# Altium PCB 3LED_3Button.PcbDoc
Units mm, origin at the board's own origin, x right, y up, seen from the top; angles counter-clockwise.
Board outline 47.05 x 63.85 mm, 2 copper layers (Top Layer, Bottom Layer), stack 1.569 mm thick; 28 components, 19 nets, 109 pads, 0 vias.
Unrouted connection lines stored in the file: 19.
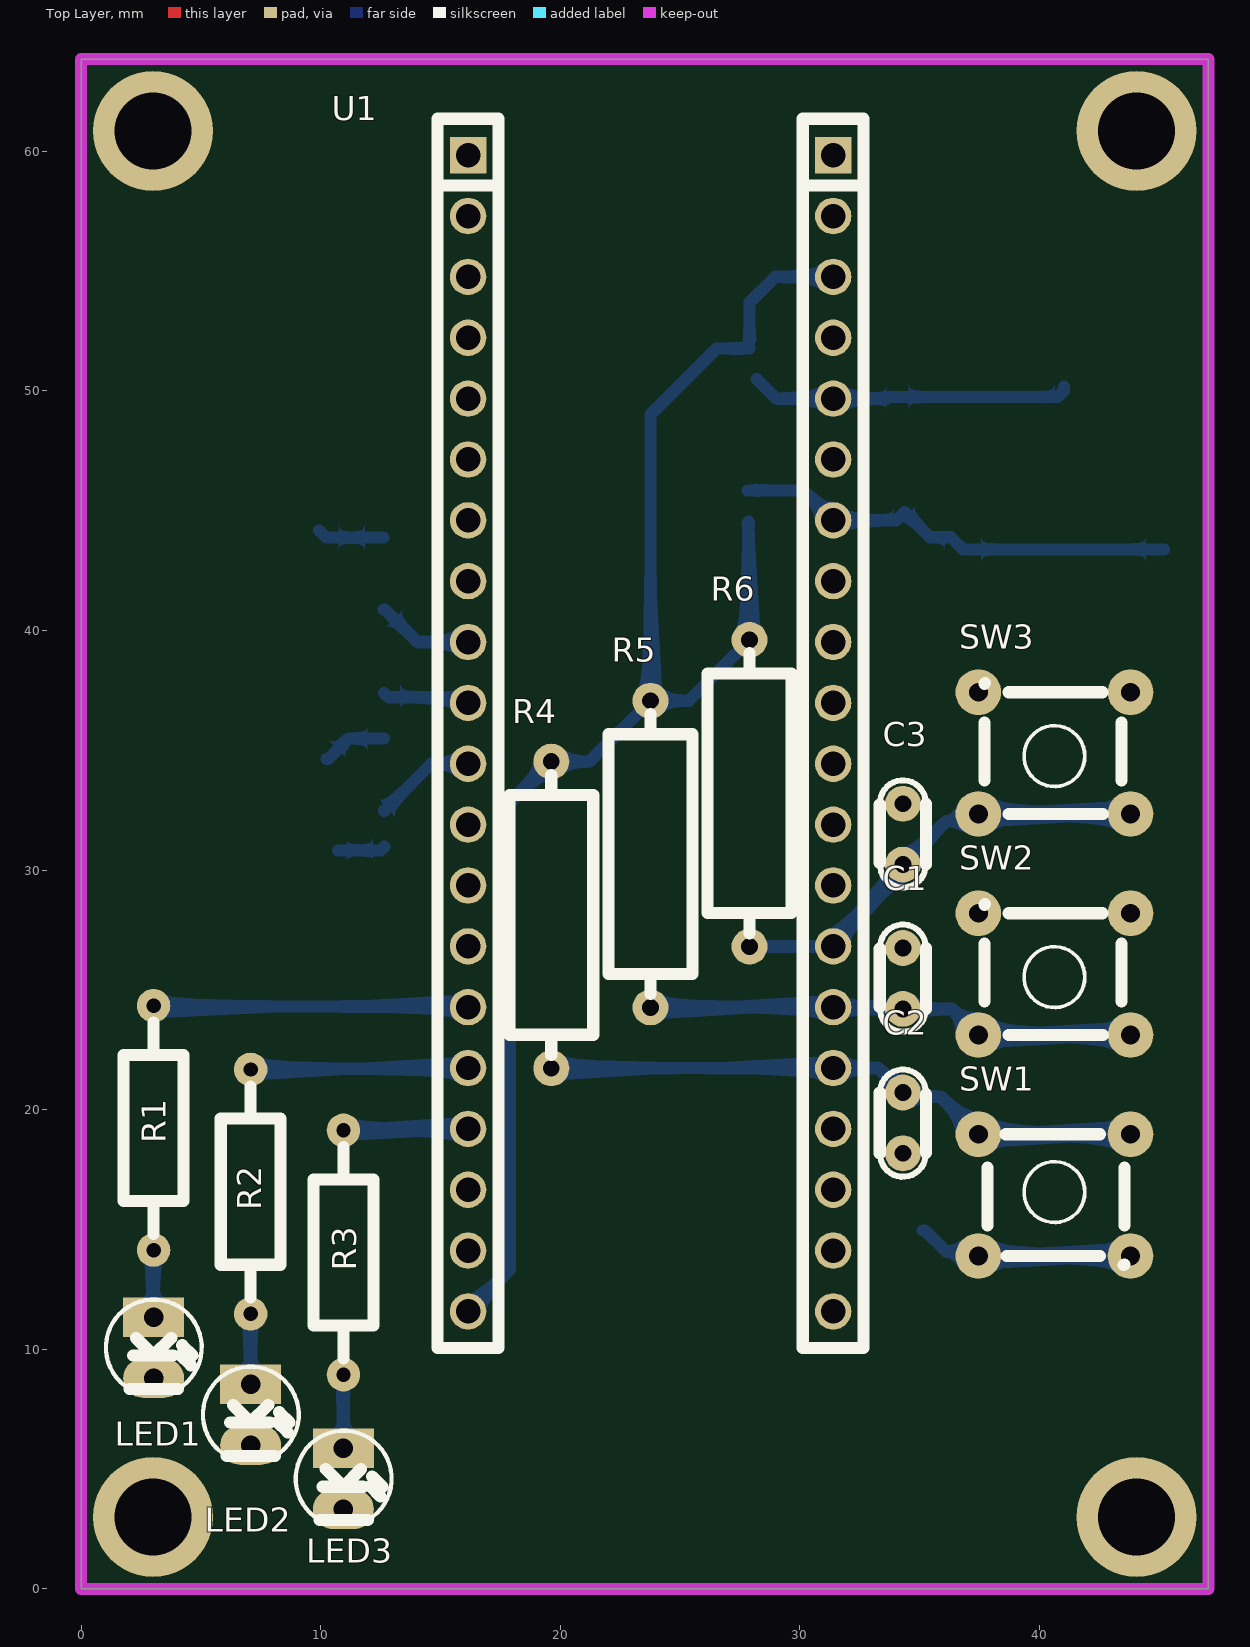
[diagram p0: Top Layer view]
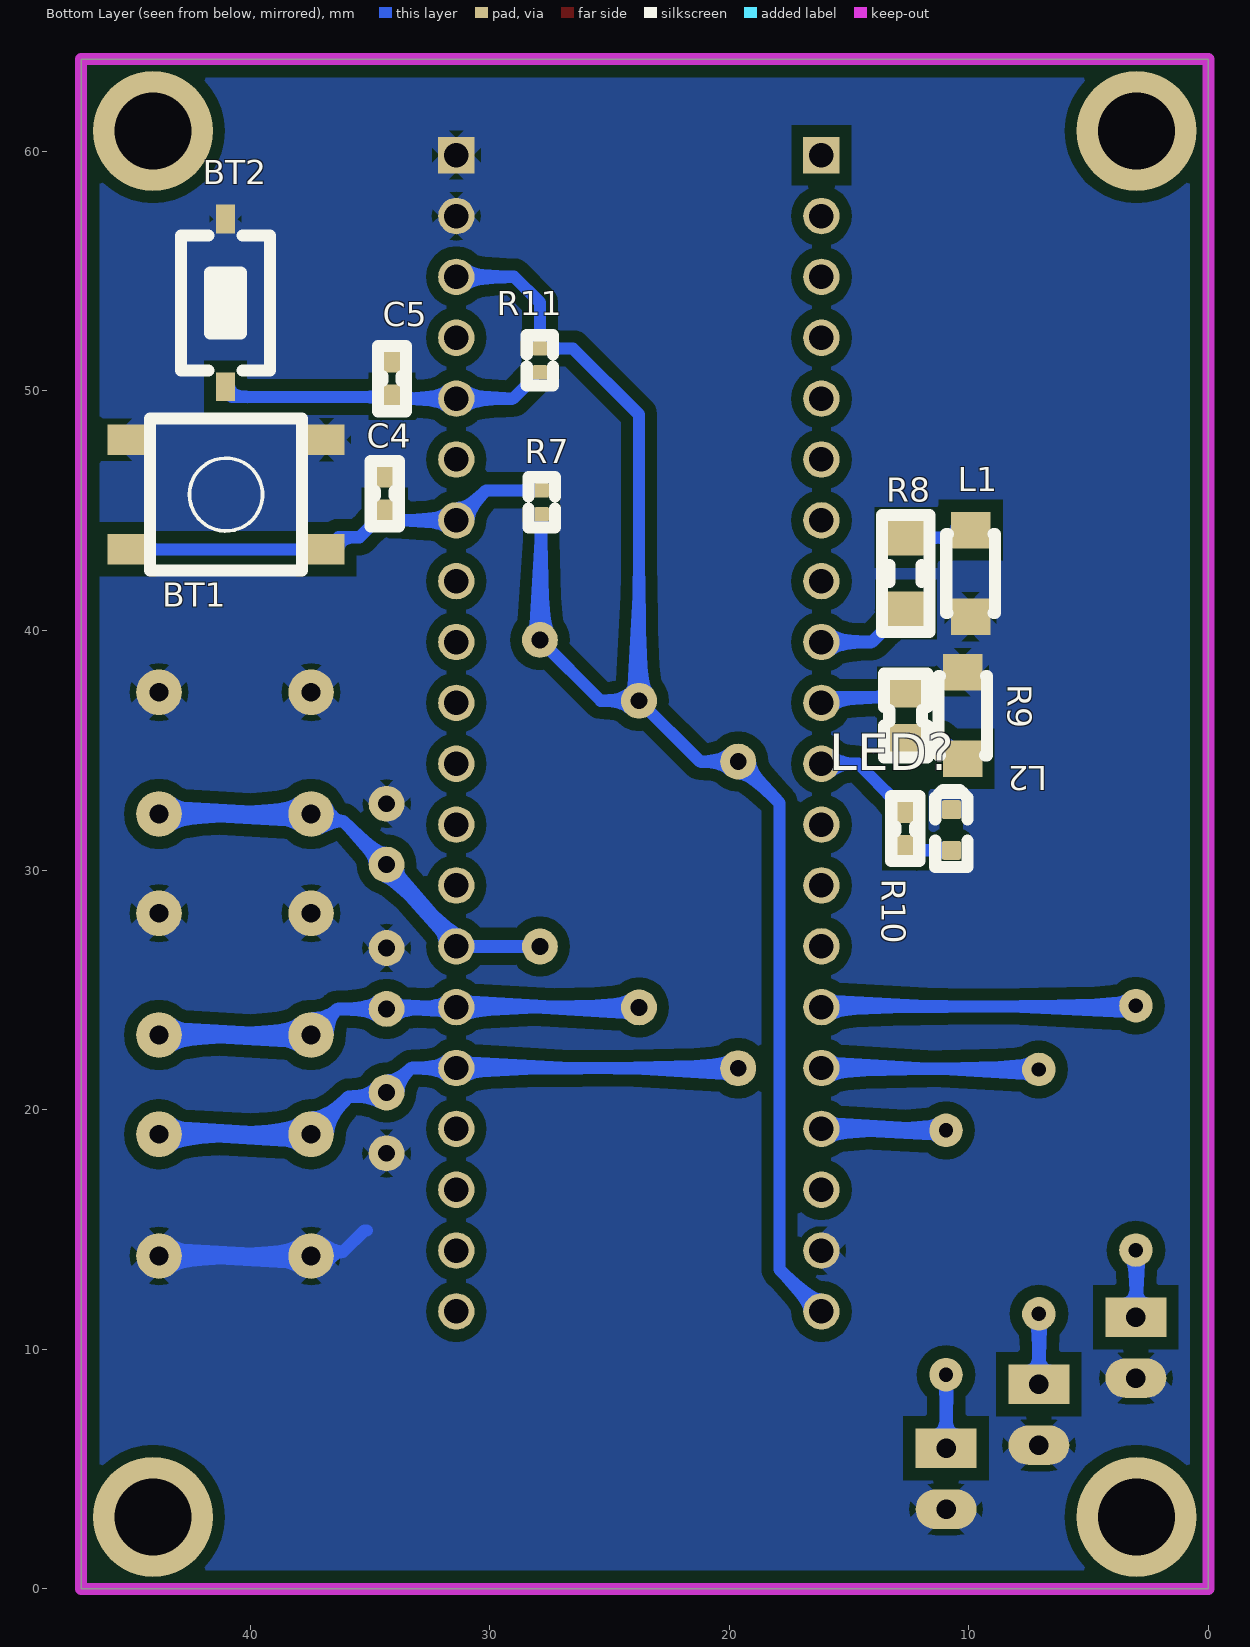
[diagram p1: Bottom Layer view, seen from below]

## Layer stack, top to bottom
Top Solder: solder mask 0.0254, SM-001, Dk 4
Top Layer: signal copper 0.035
Dielectric 1: core 1.4986, Core-043, Dk 4.3
Bottom Layer: signal copper 0.035
Bottom Solder: solder mask 0.0254, SM-001, Dk 4

## Board outline
0,0 0,63.85 47.05,63.85 47.05,0

## Design rules (kind name [scope] priority, off if disabled: settings)
Clearance [All] p1: gap=0.508 ignorepadtopadclearanceinfootprint=FALSE
PolygonConnect [All] p1: connectstyle=Relief reliefconductorwidth=1.016 reliefentries=4 polygonreliefangle="45 Angle" airgapwidth=0.254
RoutingVias [All] p1: holewidth=0.711 width=1.27 viastyle="Through Hole" minholewidth=0.711 minwidth=1.27 maxholewidth=0.711 maxwidth=1.27
SilkToSolderMaskClearance [IsPad] p1: minsilkscreentomaskgap=0.025 clearancetoexposedcopper=TRUE
SolderMaskExpansion [All] p1: expansion=0.102 istentingtop=FALSE
Width [All] p1: maxlimit=1.27 minlimit=0.254 preferedwidth=0.762
29 further rules are at their usual default settings.

## Components (designator, comment, footprint, x,y, rotation, side; value= is the part's Value field where it differs from the comment)
BT1 "Nut Nhan 4 Chan SMD 6x6" "Nut Nhan 4 Chan SMD 6x6" 41,45.675 r0 bottom
BT2 "Nut Nhan 2 Chan SMD 3x6x2.5" "Nut Nhan 2 Chan SMD 3x6x2.5" 41.025,53.675 r90 bottom
C1 "104" "tu gom" 34.3,25.477 r270 top
C2 "104" "tu gom" 34.3,19.45 r90 top
C3 "104" "tu gom" 34.3,31.5 r270 top
C4 "104" "tu 0603" 34.375,45.725 r270 bottom
C5 "104" "tu 0603" 34.075,50.525 r270 bottom
L1 "LED 0805" LED-1206-Green 9.925,44.182 r270 bottom
L2 "LED 0805" LED-1206-Blue 10.25,34.643 r90 bottom
LED1 "LED" LED-3 3.025,11.34 r270 top value="LED 3 ly Single Colour"
LED2 "LED" LED-3 7.075,8.54 r270 top value="LED 3 ly Single Colour"
LED3 "LED" LED-3 10.95,5.865 r270 top value="LED 3 ly Single Colour"
LED? "LED SMD 0603" LED-0603-GREEN 10.725,31.675 r90 bottom
R1 "1K" "tro vach 1/4w" 3.025,19.24 r270 top
R2 "1K" "tro vach 1/4w" 7.075,16.58 r270 top
R3 "1K" "tro vach 1/4w" 10.95,14.04 r270 top
R4 "10k" "tro vach 1/2w" 19.625,28.13 r90 top
R5 "10k" "tro vach 1/2w" 23.763,30.67 r270 top
R6 "10k" "tro vach 1/2w" 27.9,33.21 r270 top
R7 "Thick Film" RESC1005X40N 27.825,45.35 r270 bottom value=10K
R8 "1K" "tro smd 1206" 12.627,42.378 r90 bottom
R9 "1K" "tro smd 0805" 12.575,36.447 r270 bottom
R10 "1K" "tro smd 0603" 12.65,31.725 r90 bottom
R11 "Thick Film" RESC1005X40N 27.9,51.275 r90 bottom value=10K
SW1 "SW" SW4 37.45,18.975 r0 top value="Button chip 4 pin"
SW2 "SW" SW4 43.8,23.12 r180 top value="Button chip 4 pin"
SW3 "SW" SW4 43.8,32.345 r180 top value="Button chip 4 pin"
U1 "stm32f103 blue pill" "Stm32F103c8t6 Blue Pill" 12.34,5.71 r0 top

## Footprints (in the part's own frame and the unit in brackets; to place one, negate y for a bottom-side part, rotate by r counter-clockwise, add the part's x,y. Pads: shape width x height; smd on the part's side, far side on the other; paste and mask are expansions set on the pad)
LED-3 [mil] "LED 2 PIN, 3ly Only colour"
  rect 65x100 hole 32: 1(0,0)
  oval 65x100 hole 32: 2(100,0)
  silkscreen extent -29,-78 118,79, body extent -25,-75 113,75, height 217
LED-0603-GREEN [mm]
  round 0.254 on Mech15: 0(0,0)
  rrect25% 0.8x0.8 smd: A(-0.85,0) K(0.85,0)
  Top Layer pour cut-out: -0.5,0.5 0.5,0.5 0.5,-0.5 -0.5,-0.5
  silkscreen extent -1.55,-0.67 1.68,0.67, body extent -0.8,-0.4 0.8,0.4, height 0.75
LED-1206-Blue [mil] "Compoment SMD 120x60mil"
  rect 60x65 smd: 1(0,0) 2(142,0)
  silkscreen extent 6,-40 136,40, body extent 7,-31 133,31, height 43
LED-1206-Green [mil]
  rect 60x65 smd: 1(0,0) 2(142,0)
  silkscreen extent 6,-40 136,40, body extent 7,-31 133,31, height 43
"Nut Nhan 2 Chan SMD 3x6x2.5" [mm] "Switch SMD type"
  rect 1.2x0.8 smd: 1(-3.5,0) 2(3.5,0)
  silkscreen extent -2.82,-1.85 2.82,1.85, body extent -3.05,-1.85 3.05,1.85, height 2.5
"Nut Nhan 4 Chan SMD 6x6" [mil] "SW SMD button 4pin, 250 x250 mil"
  rect 60x50 smd: 1(-165,90) 2(165,-90) 3(165,90) 4(-165,-90)
  silkscreen extent -125,-125 125,125, body extent -180,-125 180,125, height 130
RESC1005X40N [mm] "Chip Resistor, Body 1.0x0.5mm, EIA 0402, IPC Medium Density"
  round 0.2 on Mech15: 0(0,0)
  rrect20% 0.6x0.6 smd: 1(-0.5,0) 2(0.5,0)
  Top Layer pour cut-out: -0.325,0.375 -0.2,0.5 0.2,0.5 0.325,0.375 0.325,-0.375 0.2,-0.5 -0.2,-0.5 -0.325,-0.375
  silkscreen extent -1.05,-0.55 1.05,0.55, body extent -0.52,-0.27 0.53,0.28, height 0.4
"Stm32F103c8t6 Blue Pill" [mm] "20 row, straight, gold plating"
  rect 1.52x1.52 hole 1.02: 1(3.81,54.13) 40(19.05,54.13)
  round 1.52 hole 1.02: 2(3.81,51.59) 3(3.81,49.05) 4(3.81,46.51) 5(3.81,43.97) 6(3.81,41.43) 7(3.81,38.89) 8(3.81,36.35) 9(3.81,33.81) 10(3.81,31.27) 11(3.81,28.73) 12(3.81,26.19) 13(3.81,23.65) 14(3.81,21.11) 15(3.81,18.57) 16(3.81,16.03) 17(3.81,13.49) 18(3.81,10.95) 19(3.81,8.41) 20(3.81,5.87) 21(19.05,5.87) 22(19.05,8.41) 23(19.05,10.95) 24(19.05,13.49) 25(19.05,16.03) 26(19.05,18.57) 27(19.05,21.11) 28(19.05,23.65) 29(19.05,26.19) 30(19.05,28.73) 31(19.05,31.27) 32(19.05,33.81) 33(19.05,36.35) 34(19.05,38.89) 35(19.05,41.43) 36(19.05,43.97) 37(19.05,46.51) 38(19.05,49.05) 39(19.05,51.59)
  silkscreen extent 2.54,4.35 20.32,55.65, body extent 0,0 22.86,57.56, height 20.77
SW4 [mil] "SW button 4pin, 250 x250 mil"
  round 75 hole 31: 1(0,0) 2(250,-200) 3(250,0) 4(0,-200)
  silkscreen extent 15,-215 240,0, body extent -36,-220 276,24, height 276
"tro smd 0603" [mm] "Chip Capacitor, 2-Leads, Body 1,60x0,80mm, IPC Medium Density"
  rect 1x0.95 smd mask+0.076: 1(-0.75,0) 2(0.75,0)
  silkscreen extent -1.35,-0.58 1.37,0.58, body extent -0.82,-0.42 0.82,0.43, height 0.44
"tro smd 0805" [mm]
  rect 1.2x1.4 smd: 1(-0.946,-0.061) 2(0.954,-0.061)
  silkscreen extent -1.75,-0.97 1.75,0.84, body extent -1.56,-0.76 1.44,0.64, height 0.53
"tro smd 1206" [mm]
  rect 1.5x1.6 smd: 1(-1.5,0) 2(1.5,0)
  silkscreen extent -2.44,-0.99 2.44,0.99, body extent -1.6,-0.8 1.6,0.8, height 0.6
"tro vach 1/2w" [mm]
  round 1.5 hole 0.7: 1(-6.4,0) 2(6.4,0)
  silkscreen extent -5.84,-1.75 5.84,1.75, body extent -6.62,-1.75 6.62,1.75, height 3.5
"tro vach 1/4w" [mm]
  round 1.4 hole 0.6: 1(-5.1,0) 2(5.1,0)
  silkscreen extent -4.39,-1.25 4.42,1.25, body extent -5.38,-1.2 5.38,1.2, height 2.41
"tu 0603" [mm] "Chip Capacitor, 2-Leads, Body 1,60x0,80mm, IPC Medium Density"
  rect 1x0.95 smd mask+0.076: 1(-0.75,0) 2(0.75,0)
  silkscreen extent -1.35,-0.58 1.37,0.58, body extent -0.8,-0.4 0.8,0.4, height 0.9
"tu gom" [mm] "Tu gom mini"
  round 1.5 hole 0.7: 1(-1.27,0) 2(1.27,0)
  silkscreen extent -2.25,-0.97 2.22,0.97, body extent -2.92,-0.85 2.92,0.85, height 6.12

## Part data
BT1: "Nut Nhan 4 Chan 6.2x6.2x3.5", Ma_Hang=MH002424, Ten="Nút Nhấn 4 Chân 6.2x6.2x3.1MM SMD"
C1 C2 C3: library part "Tu gom 104 50V", "Cắm", Chung_Loai=Cắm, Don_Vi=Con, Ma_Hang=MH004761, So_Chan=2, Ten_Linh_Kien="Tụ gốm 104 100nF 50V"
C4 C5: library part "Tu 0603 104 50V 10%", "Dán", Chung_Loai=Dán, Don_Vi=Con, Ma_Hang=MH004568, So_Chan=2, Ten_Linh_Kien="Tụ 0603 104-100nF 10% 50V"
L1: library part "LED 1206 Xanh La", "Dán", Chung_Loai=Dán, Don_Vi=Con, Ma_Hang=MH002947, Ten_Linh_Kien="LED1206 Màu Xanh Lá (Green)"
L2: library part "LED 1206 Xanh Duong", "Dán", Chung_Loai=Dán, Don_Vi=Con, Ma_Hang=MH002333, Ten_Linh_Kien="LED1206 Màu Xanh Dương (Blue)"
LED1 LED2 LED3: "LED Single colour Green and Red"
LED?: "LED 0603 SMD Green 525nm 350mcd 20mA", Color=Green, Current - Test=20mA, Manufacturer 1=Kingbright, Manufacturer 2="Kingbright Company LLC", Manufacturer Part Number 1=APT1608ZGCK, Manufacturer Part Number 2=APT1608-WAP24, Package / Case="0603 (1608 metric)", Ratings="200mcd min; 350 mcd typ @ 20mA", Supplier Part Number 1=604-APT1608ZGCK, Voltage - Forward (Vf) @ 10mA=3.1V, Voltage - Forward (Vf) @ 20mA=3.3V, ComponentLink1Description=http://www.mouser.com/ds/2/216/APT1608ZGCK-262051.pdf, ComponentLink1URL=http://www.mouser.com/ds/2/216/APT1608ZGCK-262051.pdf, ComponentLink2Description="APT1608-WAP24 Datasheet", ComponentLink2URL="\\SVFI2\PBLShare\Eng\Electrical Engineering\Hardware\Altium\Libraries and Templates\Unreleased Components\Part Number Request 2013-10-02\APT1608-WAP24(Ver.1B).pdf", Lens Style/Size="Rectangle with Flat Top, 1.2mm x 0.8mm", Material=InGaN, SCDType=source, Supplier 1=Mouser, Viewing Angle=120°
R1 R2 R3: library part "Tro Vach 1/4W 5% 680k", "Cắm", Chung_Loai=Cắm, Don_Vi=Con, Ma_Hang=MH007330, So_Chan=2, Ten_Linh_Kien="Trở Vạch 1/4w 5% 680k"
R4 R5 R6: library part "Tro Vach 1/2W 5% 10k", "Cắm", Chung_Loai=Cắm, Don_Vi=Con, Ma_Hang=MH006206, So_Chan=2, Ten_Linh_Kien="Trở 5% 1/2w 10k"
R7 R11: library part RES_0402, "Resistor SMD chip 1k Ohm 0.063W 5% 0402", Manufacturer 1=Yageo, Manufacturer 2="Vishay Dale", Manufacturer 3="Samsung Electro-Mechanics America, Inc", Manufacturer 4="Rohm Semiconductor", Manufacturer 5="Panasonic Electronic Components", Manufacturer Part Number 1=RC0402JR-071KL, Manufacturer Part Number 2=CRCW04021K00JNED, Manufacturer Part Number 3=RC1005J102CS, Manufacturer Part Number 4=MCR01MRTJ102, Manufacturer Part Number 5=ERJ-2GEJ102X, Package / Case="0402 (1005 Metric)", Ratings="1/16 W", Supplier Part Number 1=311-1.0KJRCT-ND, Tolerance=±5%, ComponentLink1Description=http://www.yageo.com/documents/recent/PYu-RC0402_51_RoHS_L_6.pdf, ComponentLink1URL=http://www.yageo.com/documents/recent/PYu-RC0402_51_RoHS_L_6.pdf, ComponentLink2Description=http://www.vishay.com/doc?20035, ComponentLink2URL=http://www.vishay.com/doc?20035, ComponentLink3Description=http://www.samsungsem.com/servlet/FileDownload?filename=productcatalog/pdf/Chip_Resistor.pdf, ComponentLink3URL=http://www.samsungsem.com/servlet/FileDownload?filename=productcatalog/pdf/Chip_Resistor.pdf, ComponentLink4Description=http://rohmfs.rohm.com/en/products/databook/datasheet/passive/resistor/chip_resistor/mcr_g.pdf, ComponentLink4URL=http://rohmfs.rohm.com/en/products/databook/datasheet/passive/resistor/chip_resistor/mcr_g.pdf, ComponentLink5Description=http://industrial.panasonic.com/www-cgi/jvcr13pz.cgi?E+PZ+3+AOA0001+ERJ2GEJ102X+7+WW, ComponentLink5URL=http://industrial.panasonic.com/www-cgi/jvcr13pz.cgi?E+PZ+3+AOA0001+ERJ2GEJ102X+7+WW, RoHS 1="RoHS Compliant", RoHS 2="RoHS Compliant", RoHS 3="RoHS Compliant", RoHS 4="RoHS Compliant", RoHS 5="RoHS Compliant", SCDType=spec, Supplier 1=Digi-Key, Supplier 2=Digi-Key, Supplier 3=Digi-Key, Supplier 4=Digi-Key, Supplier 5=Digi-Key, Supplier Part Number 2=541-1.0KJCT-ND, Supplier Part Number 3=1276-4376-1-ND, Supplier Part Number 4=RHM1.0KCECT-ND, Supplier Part Number 5=P1.0KJCT-ND
R8: library part "Tro 1206 5% 680R", "Dán", Chung_Loai=Dán, Don_Vi=Con, Ma_Hang=MH005928, So_Chan=2, Ten_Linh_Kien="Trở 1206 5% 680R"
R9: library part "Tro 0805 1% 680R", "Dán", Chung_Loai=Dán, Don_Vi=Con, Ma_Hang=MH005487, So_Chan=2, Ten_Linh_Kien="Trở 0805 1% 680R"
R10: library part "Tro 0603 1% 680R", "Dán", Chung_Loai=Dán, Don_Vi=Con, Ma_Hang=MH006336, So_Chan=2, Ten_Linh_Kien="Trở 0603 1% 680R"
SW1 SW2 SW3: library part SW4, "Switch button 4 pin"
BT2: Ma_Hang=MH001036, Ten="Nút Nhấn 2 Chân 3x6x2.5MM SMD"

## Free pads (board coordinates)
  round 5 hole 3.2: 1(3,60.85) 2(44.05,60.85) 3(44.05,3) 4(3,3)

## Nets (pads, with @x,y where several pads share a name; then routed paths per layer and width w, separated by ;. In a path a pad name is that pad's centre, name@x,y a point inside that pad or via, vN(x,y) a via of type N, cw(c..) or ccw(c..) an arc to the next point about the centre after c; other vN are vias at no path point)
3V3: R4.2 R5.1 R6.1 R7.2 R11.2 U1.20 U1.38 | length 62.5
  Bottom Layer w0.508: U1.20 17.898,13.328 17.898,32.803 R4.2 21.223,34.53 R5.1 ; 27.85,44.55 27.85,39.66 R6.1 25.36,37.07 R5.1 ; R11.2 26.525,51.775 23.763,49.013 R5.1 ; 27.9,52.075 27.9,53.69 28.98,54.77 28.99,54.76 U1.38
GND: BT1.2 BT1.4 BT2.2 C1.1 C2.1 C3.1 C4.1 C5.1 L1.2 L2.2 LED1.2 LED2.2 LED3.2 LED?.K SW1.2 SW1.4 SW2.2 SW2.4 SW3.2 SW3.4 U1.19 U1.39 U1.40 | length 9.1
  Bottom Layer w0.508: 35.125,14.963 35.22,14.963 36.117,14.066 37.279,14.066 SW1.4 SW1.2
LD1: R1.1 U1.15 | length 13.1
  Bottom Layer w0.508: R1.1 3.055,24.31 16.12,24.31 U1.15
LD2: R2.1 U1.16 | length 9.1
  Bottom Layer w0.508: R2.1 7.105,21.71 16.12,21.71 U1.16
LD3: R3.1 U1.17 | length 5.2
  Bottom Layer w0.508: R3.1 10.98,19.17 16.12,19.17 U1.17
LD4: R10.2 U1.11 | length 4.3
  Bottom Layer w0.508: R10.2 12.65,32.5 12.998,32.848 13.023,32.848 14.615,34.44 U1.11
LD5: R9.1 U1.10 | length 3.7
  Bottom Layer w0.508: R9.1 12.803,37.225 15.562,37.225 15.807,36.98 U1.10
LD6: R8.1 U1.9 | length 4.1
  Bottom Layer w0.508: R8.1 12.677,40.878 14.036,39.52 U1.9
NetL1_1: L1.1 R8.2 | length 2.8
  Bottom Layer w0.508: L1.1 10.228,43.878 R8.2
NetL2_1: L2.1 R9.2 | length 2.7
  Bottom Layer w0.508: L2.1 10.313,34.643 11.162,35.492 R9.2
NetLED1_1: LED1.1 R1.2 | length 2.8
  Bottom Layer w0.508: LED1.1 R1.2
NetLED2_1: LED2.1 R2.2 | length 2.9
  Bottom Layer w0.508: LED2.1 R2.2
NetLED3_1: LED3.1 R3.2 | length 3.1
  Bottom Layer w0.508: LED3.1 R3.2
NetLED?_A: LED?.A R10.1 | length 2
  Bottom Layer w0.508: LED?.A 12.5,30.825 R10.1
SW1: C2.2 R4.1 SW1.1 SW1.3 U1.25 | length 25.3
  Bottom Layer w0.508: R4.1 19.63,21.735 31.385,21.735 U1.25 33.28,21.74 C2.2 34.473,20.547 35.878,20.547 SW1.1 SW1.3
SW2: C1.2 R5.2 SW2.1 SW2.3 U1.26 | length 20.5
  Bottom Layer w0.508: R5.2 23.768,24.275 31.385,24.275 U1.26 31.427,24.243 34.263,24.243 C1.2 36.363,24.207 SW2.3 SW2.1
SW3: C3.2 R6.2 SW3.1 SW3.3 U1.27 | length 18.5
  Bottom Layer w0.508: R6.2 27.905,26.815 31.385,26.815 U1.27 31.39,27.07 34.3,29.98 C3.2 36.117,32.047 37.152,32.047 SW3.3 SW3.1
SW4: BT1.1 BT1.3 C4.2 R7.1 U1.34 | length 18.7
  Bottom Layer w0.508: R7.1 30.14,45.85 U1.34 34.025,44.6 34.375,44.95 35.428,43.897 36.301,43.897 BT1.1 BT1.3
SW5: BT2.1 C5.2 R11.1 U1.36 | length 13.5
  Bottom Layer w0.508: 28.2,50.498 29.018,49.68 U1.36 33.655,49.68 33.725,49.75 40.752,49.75 41.025,50.023 BT2.1
pads on no net: LED?.0 R7.0 R11.0 U1.1 U1.2 U1.3 U1.4 U1.5 U1.6 U1.7 U1.8 U1.12 U1.13 U1.14 U1.18 U1.21 U1.22 U1.23 U1.24 U1.28 U1.29 U1.30 U1.31 U1.32 U1.33 U1.35 U1.37

## Polygon pours and split planes (outlines as drawn)
GND on Bottom Layer "GND" (solid, pour order 1): 0,0 0,63.85 47.05,63.85 47.05,0

## Keep-outs
Keep-Out Layer:
  the board outline again, w0.508